# Altium PCB Robotic.PcbDoc
Units mil, origin at the board's own origin, x right, y up, seen from the top; angles counter-clockwise.
Board outline 2165.35 x 1377.95 mil, 2 copper layers (Top Layer, Bottom Layer), stack 61.8 mil thick; 28 components, 16 nets, 79 pads, 273 vias.
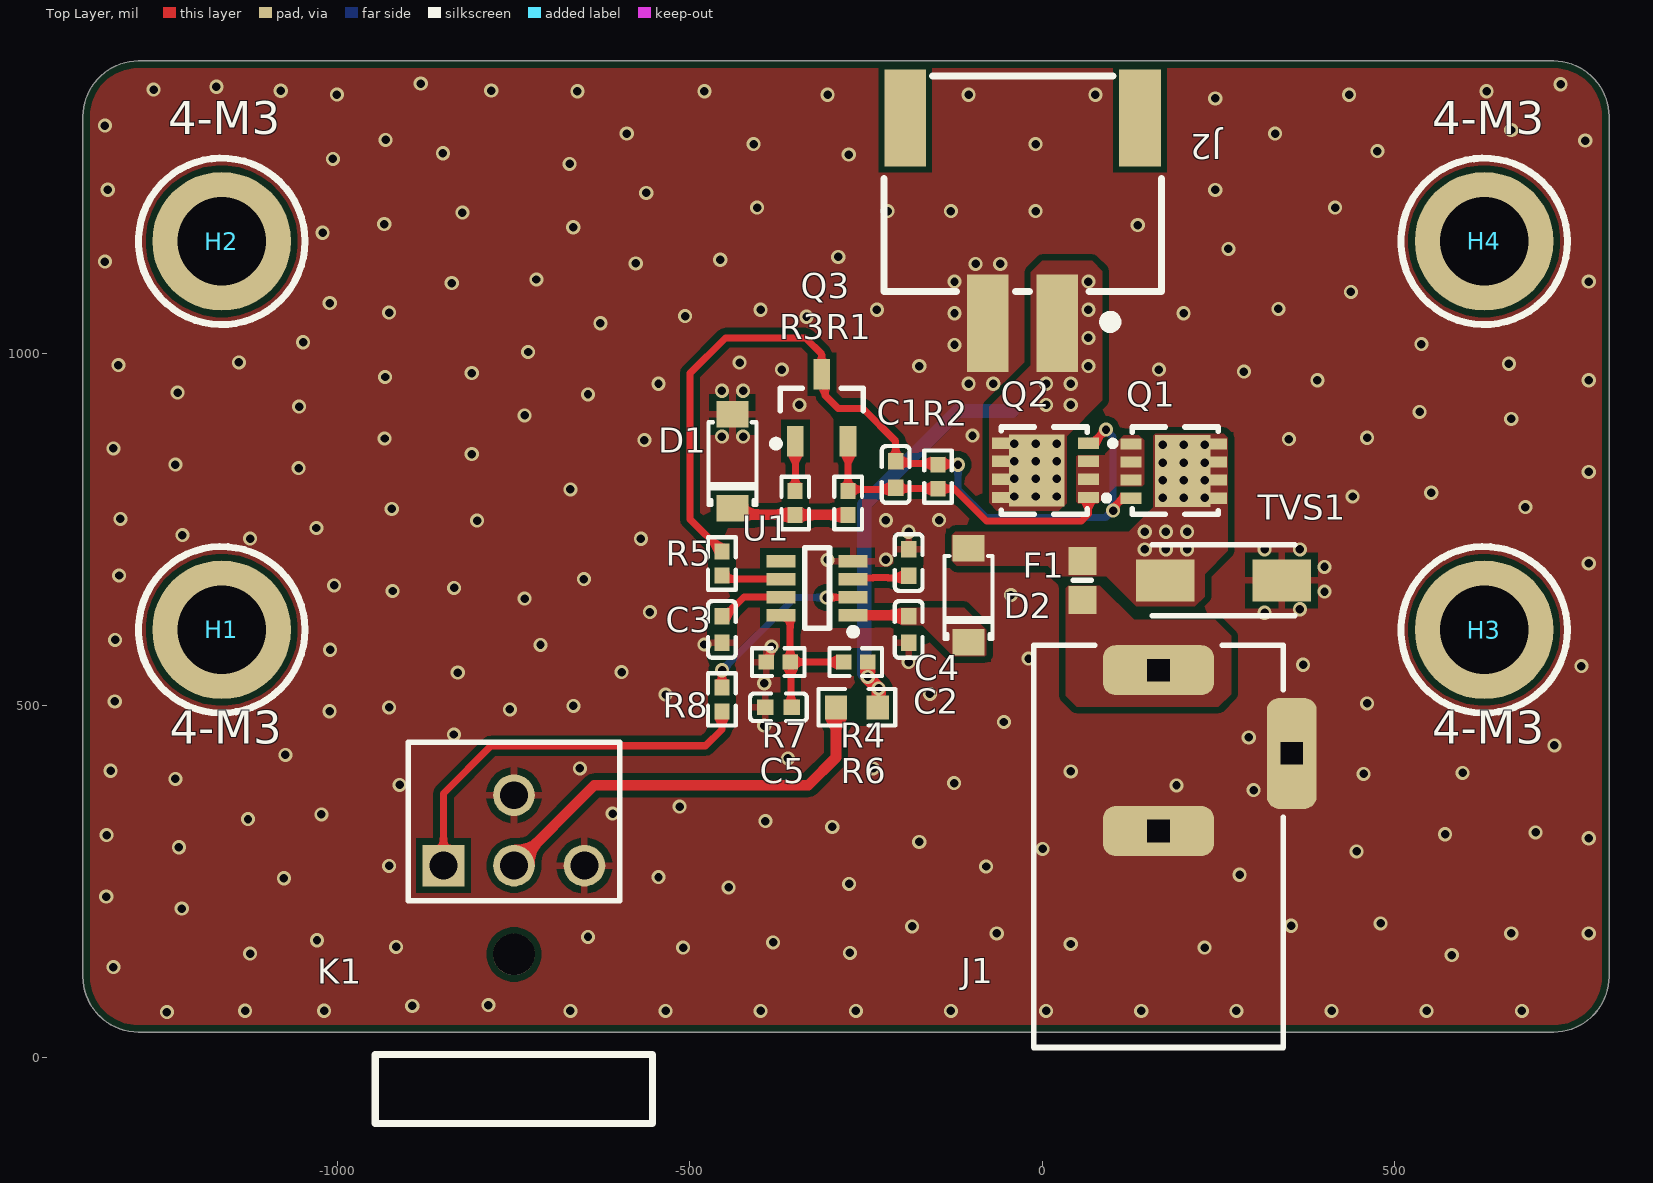
[diagram p0: Top Layer view]
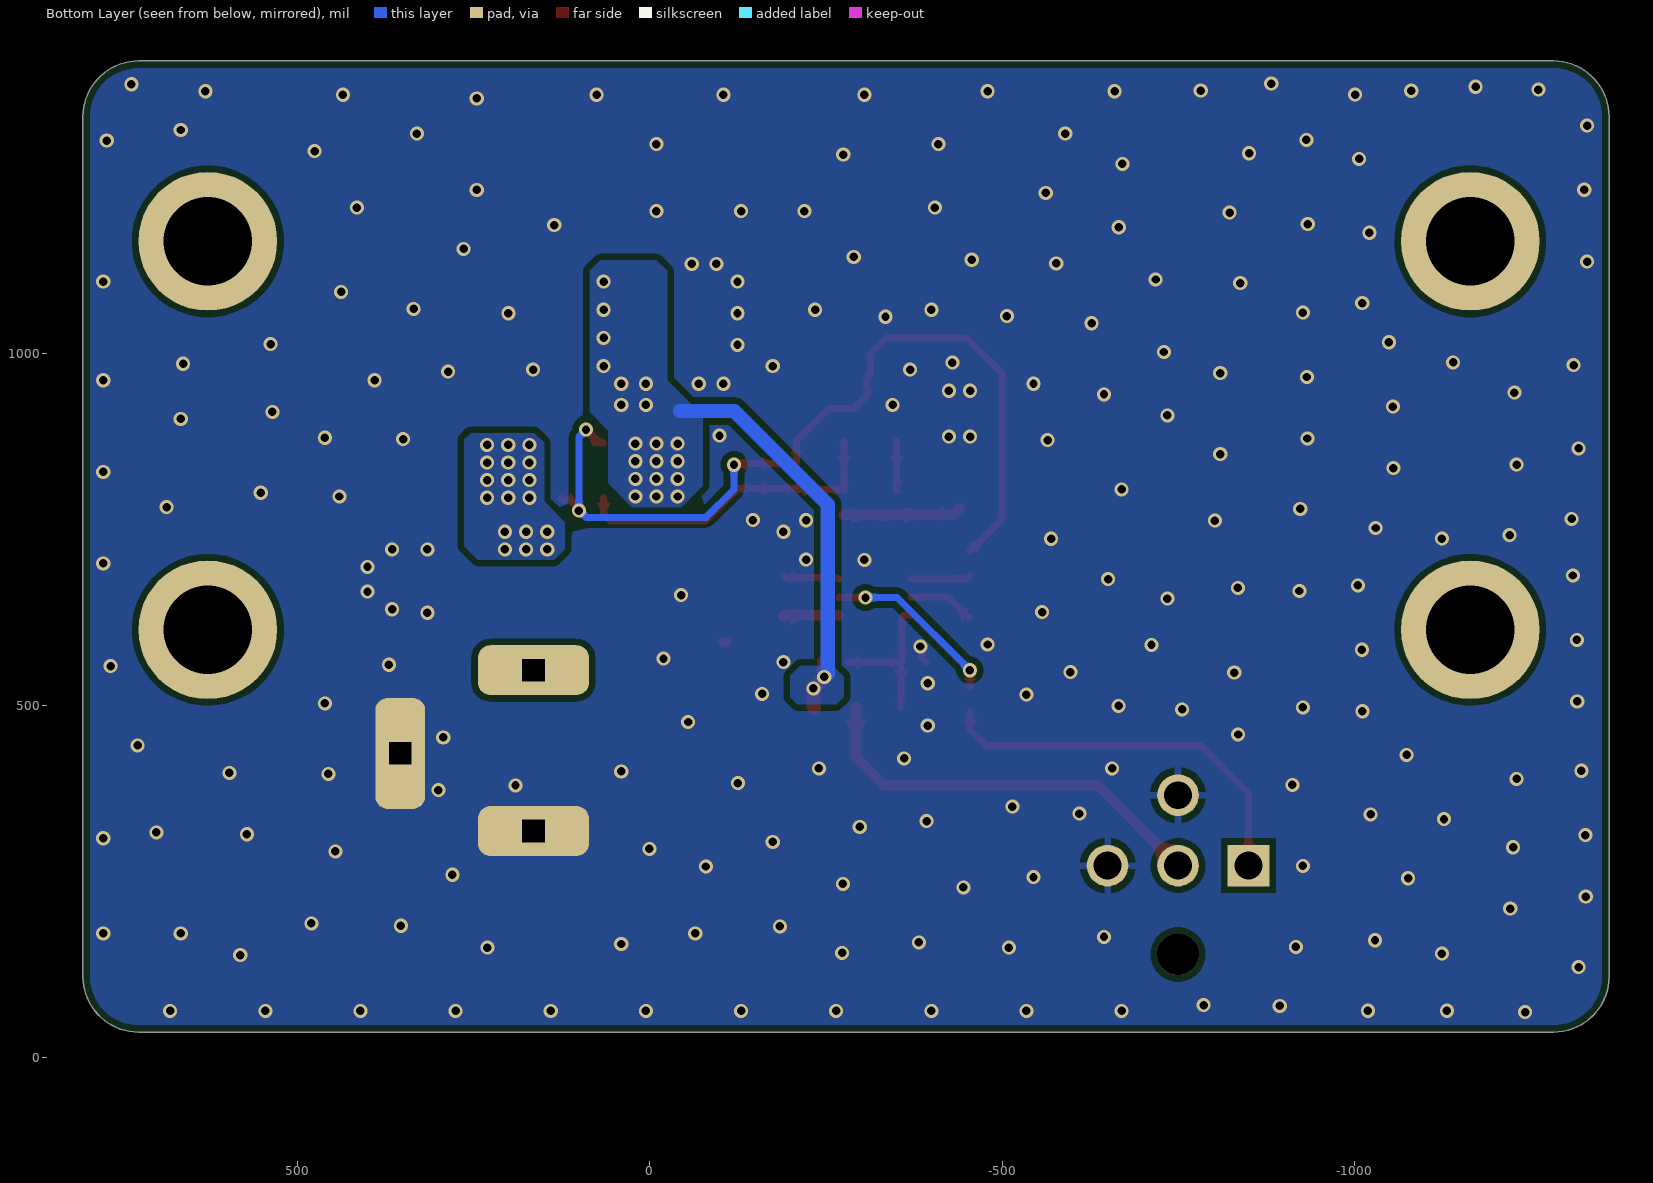
[diagram p1: Bottom Layer view, seen from below]
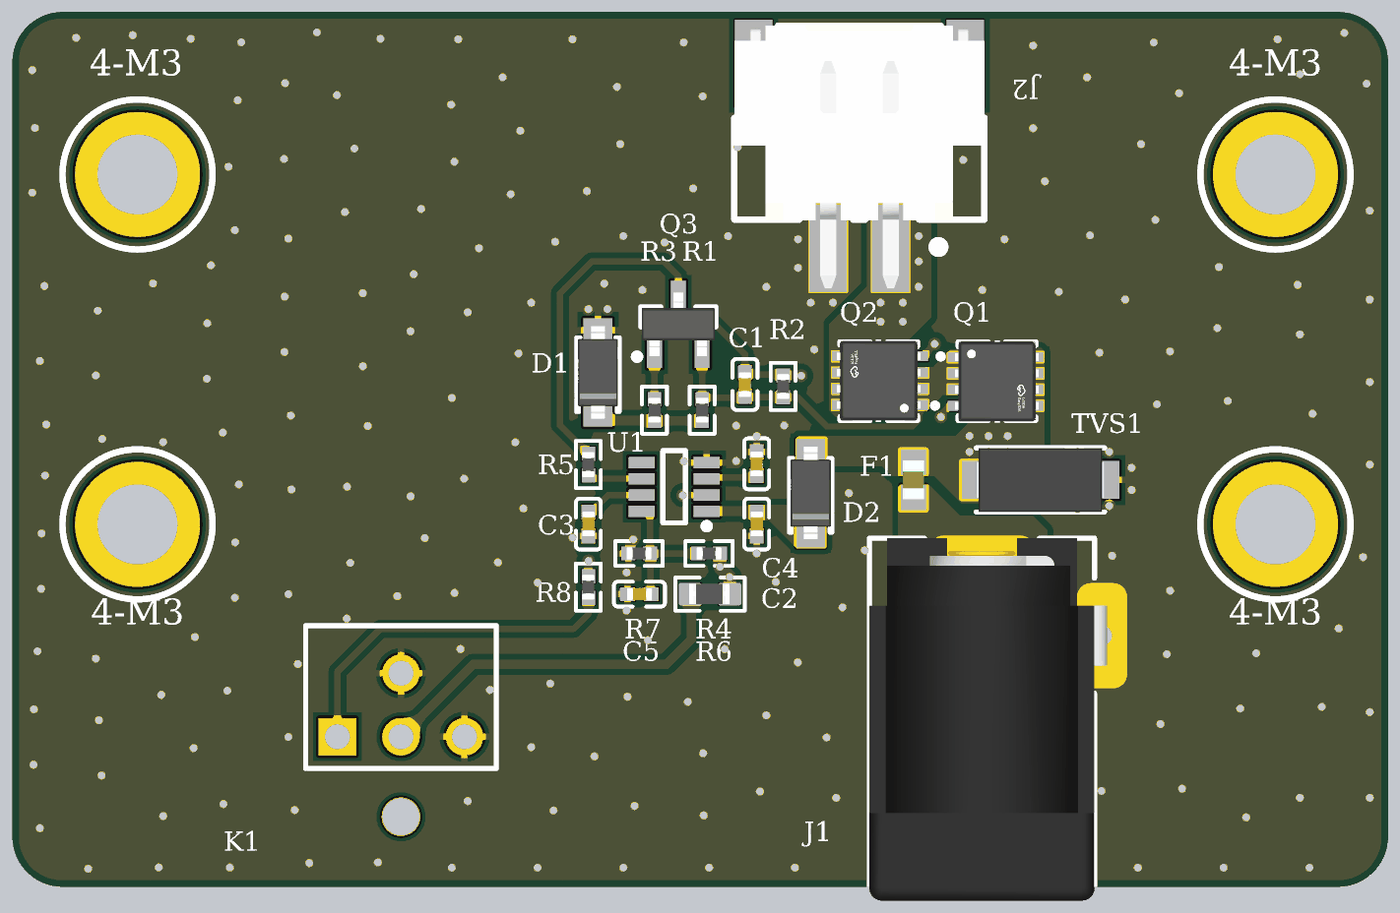
[diagram p2: 3D render of the assembled board from above, using the file's embedded part models]

## Layer stack, top to bottom
Top Solder: solder mask 0.4, Solder Resist, Dk 3.5
Top Layer: signal copper 1.4
Dielectric 1: core 59, Core-043, Dk 4.3
Bottom Layer: signal copper 1.4
Bottom Solder: solder mask 0.4, Solder Resist, Dk 3.5

## Board outline
-1361.17,115.44 -1361.17,1335.91 cw(c-1282.43,1335.91) -1282.43,1414.65 725.44,1414.65 cw(c725.44,1335.91) 804.18,1335.91 804.18,115.44 cw(c725.44,115.44) 725.44,36.7 -1282.43,36.7 cw(c-1282.43,115.44)

## Design rules (kind name [scope] priority, off if disabled: settings)
AcuteAngle [All] p1: minimum=6.00000000000000E+0001 checktracksonly=FALSE
BoardOutlineClearance BoardOutlineClearance_1 [OnLayer('Bottom Layer')] p1: gap=10 ignorepadtopadclearanceinfootprint=FALSE
BoardOutlineClearance [OnLayer('Top Layer')] p2: gap=10 ignorepadtopadclearanceinfootprint=FALSE
Clearance [All] p1: gap=9 ignorepadtopadclearanceinfootprint=TRUE
HoleSize [All] p1: absolutevalues=TRUE maxlimit=999 minlimit=1 maxpercent=80.000 minpercent=20.000
HoleToHoleClearance [All] p1: gap=6 allowstackedmicrovias=TRUE
MinimumAnnularRing [All] p1: minimumring=4
MinimumSolderMaskSliver [All] p1: minsoldermaskwidth=4
PasteMaskExpansion [All] p1: expansion=0 thpadusetoppaste=TRUE thpadusebottompaste=TRUE
PlaneConnect [All] p1: pad.planeconnectstyle=Relief pad.reliefexpansion=20 pad.reliefentries=4 pad.reliefconductorwidth=10 pad.reliefairgap=10 via.planeconnectstyle=Direct via.reliefexpansion=20 via.reliefentries=4 via.reliefconductorwidth=10 via.reliefairgap=10
PolygonConnect PolygonConnect_GND [InNet('GND')] p1: thpad.connectstyle=Direct thpad.reliefconductorwidth=10 thpad.reliefentries=4 thpad.polygonreliefangle="90 Angle" thpad.airgapwidth=10 smdpad.connectstyle=Relief smdpad.reliefconductorwidth=10 smdpad.reliefentries=4 smdpad.polygonreliefangle="90 Angle" smdpad.airgapwidth=10 via.connectstyle=Direct via.reliefconductorwidth=10 via.reliefentries=4 via.polygonreliefangle="90 Angle" via.airgapwidth=10
PolygonConnect [All] p2: connectstyle=Direct reliefconductorwidth=10 reliefentries=4 polygonreliefangle="90 Angle" airgapwidth=10
RoutingVias [All] p1: holewidth=12 width=20 viastyle="Through Hole" minholewidth=8 minwidth=18 maxholewidth=80 maxwidth=80
ShortCircuit [InNet('VCC12V0_IN') vs InNet('VCC12V_DCIN')] p1: allowed=FALSE
SilkToSilkClearance [All] p1: silktosilkclearance=0
SilkToSolderMaskClearance [All] p1: minsilkscreentomaskgap=0 clearancetoexposedcopper=TRUE
SolderMaskExpansion SolderMaskExpansion_via [IsVia] p1: expansion=4 istentingtop=TRUE
SolderMaskExpansion [All] p2: expansion=4 istentingtop=FALSE
SupplyNets "Schematic Supply Nets_4" [InNet('VCC12V_DCIN')] p1: voltage=0.000
SupplyNets "Schematic Supply Nets_1" [InNet('VCC12V0_IN')] p2: voltage=0.000
SupplyNets "Schematic Supply Nets_3" [InNet('GND')] p3: voltage=0.000
UnRoutedNet [All] p1: checkbadconnections=TRUE
Width [All] p1: maxlimit=78.74 minlimit=8 preferedwidth=10
21 further rules are at their usual default settings.

## Classes and differential pairs
component class Top: H1 H2 H3 H4
component class Port: J2
component class Power: * C1 C2 C3 C4 C5 D1 D2 F1 J1 K1 Q1 Q2 Q3 R1 R2 R3 R4 R5 R6 R7 R8 TVS1 U1

## Components (designator, comment, footprint, x,y, rotation, side; value= is the part's Value field where it differs from the comment)
C1 "100nF ±10% 50V X7R" C0402 -207.98,846.62 r270 top
C2 "100nF ±10% 50V X7R" C0402 -189.56,589.3 r90 top
C3 "1uF ±10% 25V X5R" C0402 -454.56,589.3 r90 top
C4 "15nF ±5% 16V X7R" C0402 -189.56,721.7 r270 top
C5 "100nF ±10% 50V X7R" C0402 -392.98,497.57 r0 top
D1 "SS14" SOD-123_L2.8-W1.8-LS3.7-RD -439.56,846.7 r90 top
D2 "SS14" SOD-123_L2.8-W1.8-LS3.7-RD -104.56,656.7 r90 top
F1 "0438005.WRGT" FUSC1508X58N 57.02,677.57 r90 top
H1 "M3" M3_PTH-VIA -1164.32,607.57 r0 top
H2 "M3" M3_PTH-VIA -1164.32,1158.75 r0 top
H3 "M3" M3_PTH-VIA 627.02,607.57 r0 top
H4 "M3" M3_PTH-VIA 627.02,1158.75 r0 top
J1 "694106301002" 694106301002 165,300.29 r0 top
J2 "ZX-XH2.54-2PWT" CONN-SMD_2P-P2.54_MEGASTAR_ZX-XH2.54-2PWT -27.9,1188.12 r180 top
K1 "带灯按键 90度" "带灯按键 90度" -749.61,272.92 r0 top
Q1 "NTTFS5116PLTWG" PDFN3333-8_L3.1-W3.2-P0.65-LS3.4-BL 186.11,832.65 r270 top
Q2 "NTTFS5116PLTWG" PDFN3333-8_L3.1-W3.2-P0.65-LS3.4-BL 5.07,833.9 r90 top
Q3 "PNP-SOT23" SOT23-3 -312.98,922.57 r90 top
R1 "Ω ±1% 62.5mW" R0402 -275.54,787.54 r270 top
R2 "10kΩ ±1% 62.5mW" R0402 -147.98,824.84 r270 top
R3 "Ω ±1% 62.5mW" R0402 -350.56,787.54 r270 top
R4 "182kΩ ±1% 62.5mW" R0402 -264.56,561.7 r0 top
R5 "10kΩ ±1% 62.5mW" R0402 -454.56,701.7 r90 top
R6 "1kΩ ±1% 100mW" R0603 -262.98,497.57 r0 top
R7 "10kΩ ±1% 62.5mW" R0402 -374.72,561.7 r0 top
R8 "0Ω ±1% 62.5mW" R0402 -454.56,508.73 r90 top
TVS1 "SMAJ13A" DIONM5126X250N 257.02,677.57 r0 top
U1 "LTC2954ITS8-2#PBF(LTCNK)" SOT23-8 -319.56,666.7 r180 top

## Footprints (in the part's own frame and the unit in brackets; to place one, negate y for a bottom-side part, rotate by r counter-clockwise, add the part's x,y. Pads: shape width x height; smd on the part's side, far side on the other; paste and mask are expansions set on the pad)
694106301002 [mm] "DC Power Jack Right Angled(6.4)"
  rrect50% 4x1.8 hole 0.8 square: 1(0,6.35) 2(0,0.55)
  rrect50% 1.8x4 hole 0.8 square: 3(4.8,3.35)
  silkscreen extent -4.5,-7.25 4.5,7.25, body extent -4.5,-7.25 5,7.25, height 10.75
C0402 [mm]
  rect 0.6x0.55 smd paste-100 mask+0.051: 1(0,0) 2(0.95,0)
  silkscreen extent -0.55,-0.5 1.5,0.5, body extent -0.02,-0.25 0.98,0.25, height 0.5
CONN-SMD_2P-P2.54_MEGASTAR_ZX-XH2.54-2PWT [mm]
  rect 1.5x3.5 smd paste+0 mask+0.05: 1(-1.25,3.7) 2(1.25,3.7) 3(-4.23,-3.7) 4(4.23,-3.7)
  silkscreen extent -5,-5.21 5,3.85, body extent -5,-5.21 5,5.29, height 6.2
DIONM5126X250N [mm]
  rect 2.1x1.5 smd: 1(-2.1,0) 2(2.1,0)
  silkscreen extent -2.57,-1.28 2.57,1.28, body extent -2.57,-1.28 2.57,1.28, height 2.5
FUSC1508X58N [mm]
  rect 1x1.02 smd: 1(-0.705,0) 2(0.705,0)
  silkscreen extent 0,-0.32 0,0.32, body extent -0.77,-0.43 0.77,0.43, height 0.58
M3_PTH-VIA [mm] "Hole with copper"
  round 5 hole 3.2 mask+0.102: 0(0,0)
  silkscreen extent -3,-3 3,3
PDFN3333-8_L3.1-W3.2-P0.65-LS3.4-BL [mm]
  rect 0.4x0.8 smd paste-100 mask+0.051: D(-0.975,1.533) D(-0.325,1.533) D(0.325,1.533) D(0.975,1.533)
  rect 2.6x2 smd paste-100 mask+0.051: D(-0.005,0.333)
  rect 0.4x0.75 smd paste-100 mask+0.051: G(0.975,-1.533) S(-0.975,-1.533) S(-0.325,-1.533) S(0.325,-1.533)
  silkscreen extent -1.59,-2.29 1.56,1.61, body extent -1.65,-1.61 1.65,1.74, height 0.82
R0402 [mm]
  rect 0.566x0.54 smd mask+0.051: 1(-0.433,0) 2(0.433,0)
  silkscreen extent -0.94,-0.5 0.94,0.5, body extent -0.5,-0.25 0.5,0.25, height 0.5
R0603 [mil]
  rect 31.75x34.02 smd mask+2: 1(-29.66,0) 2(29.66,0)
  silkscreen extent -55,-26 55,26, body extent -33,-16 31,16, height 18
SOD-123_L2.8-W1.8-LS3.7-RD [mm]
  rect 0.95x1.15 smd: 1(-1.692,0) 2(1.692,0)
  silkscreen extent -1.58,-0.87 1.41,0.87, body extent -1.85,-0.8 1.85,0.8, height 1.27
SOT23-3 [mm] "SOT23, 3-Leads, Body 2.92x2.78mm, Pitch 0.95mm, IPC Medium Density"
  rect 1.1x0.6 smd: 1(-1.2,0.95) 2(-1.2,-0.95) 3(1.2,0)
  silkscreen extent -1.42,-1.5 0.7,1.78, body extent -1.27,-1.46 1.27,1.46, height 0.95
SOT23-8 [mm]
  rect 1.05x0.45 smd: 1(-1.3,0.975) 2(-1.3,0.325) 3(-1.3,-0.325) 4(-1.3,-0.975) 5(1.3,-0.975) 6(1.3,-0.325) 7(1.3,0.325) 8(1.3,0.975)
  silkscreen extent -1.42,-1.45 0.45,1.7, body extent -0.81,-1.45 0.81,1.45, height 1.25
"带灯按键 90度" [mm]
  rect 1.5x1.5 hole 1: 1(-2.54,0)
  round 1.5 hole 1: 2(2.54,0) 3(0,2.54) 4(0,0)
  round 1.5 hole 1.5: ""(0,-3.2)
  silkscreen extent -5,-9.3 5,4.44, body extent -4.1,-9.3 4.1,4.44, height 8.2

## Part data
C1 C2: library part C0402, "CL05B104KB54PNC", LatestRevisionDate=17-Jul-2002, LatestRevisionNote="Re-released for DXP Platform.", PackageDescription="Radial Cap, Thru-Hole; 2 Leads; 0.3 in Pin Spacing", PackageReference=RAD-0.3, Published=8-Jun-2000, Publisher="Altium Limited"
C3: library part C0402, "CL05A105KA5NQNC", LatestRevisionDate=17-Jul-2002, LatestRevisionNote="Re-released for DXP Platform.", PackageDescription="Radial Cap, Thru-Hole; 2 Leads; 0.3 in Pin Spacing", PackageReference=RAD-0.3, Published=8-Jun-2000, Publisher="Altium Limited"
C4: library part C0402, "CC0402JRX7R7BB153", LatestRevisionDate=17-Jul-2002, LatestRevisionNote="Re-released for DXP Platform.", PackageDescription="Radial Cap, Thru-Hole; 2 Leads; 0.3 in Pin Spacing", PackageReference=RAD-0.3, Published=8-Jun-2000, Publisher="Altium Limited"
C5: library part C0402, "NC", LatestRevisionDate=17-Jul-2002, LatestRevisionNote="Re-released for DXP Platform.", PackageDescription="Radial Cap, Thru-Hole; 2 Leads; 0.3 in Pin Spacing", PackageReference=RAD-0.3, Published=8-Jun-2000, Publisher="Altium Limited"
D1: library part Diode_Schottky, "NC", Average Rectified Current (Io)=3A, Forward Voltage (Vf@If)=500mV@3A, JLCPCB Part Class=扩展库, LCSC Part Name="40V 3A 500mV@3A", Manufacturer=DIODES(美台), Manufacturer Part=B340A-13-F, Reverse Voltage (Vr)=40V, Add into BOM=yes, Convert to PCB=yes, Datasheet=https://atta.szlcsc.com/upload/public/pdf/source/20171023/C134454_15087453575121052549.pdf, Device=B340A-13-F, Name=B340A-13-F, Supplier=LCSC, Supplier Footprint=SMA(DO-214AC), Supplier Part=C85098, Symbol=B340A-13-F
D2: library part Diode_Schottky, "直流反向耐压(Vr):40V;平均整流电流(Io):3A;正向压降(Vf):500mV@3A;", Average Rectified Current (Io)=3A, Forward Voltage (Vf@If)=500mV@3A, JLCPCB Part Class=扩展库, LCSC Part Name="40V 3A 500mV@3A", Manufacturer=DIODES(美台), Manufacturer Part=B340A-13-F, Reverse Voltage (Vr)=40V, Add into BOM=yes, Convert to PCB=yes, Datasheet=https://atta.szlcsc.com/upload/public/pdf/source/20171023/C134454_15087453575121052549.pdf, Device=B340A-13-F, Name=B340A-13-F, Supplier=LCSC, Supplier Footprint=SMA(DO-214AC), Supplier Part=C85098, Symbol=B340A-13-F
F1: "Fuse", Manufacturer_Name=LITTELFUSE, Mouser Part Number=576-0438005.WRGT, Datasheet Link=https://componentsearchengine.com/Datasheets/1/0438005.WRGT.pdf, Height=0.582mm, Manufacturer_Part_Number=0438005.WRGT, Mouser Price/Stock=https://www.mouser.com/Search/Refine.aspx?Keyword=576-0438005.WRGT
H1 H2 H3 H4: library part PTH_via, "Hole with copper"
J1: "WR-DC DC Power Jack Connector, Male, Right Angled, 24V, 5A / 694106301002", Manufacturer="Wurth Elektronik", Operating Temperature Max=85°C, Operating Temperature Min=-40°C, Rated Current=5A, Working Voltage=24V, Category="DC Power Jack Connector", ComponentLink1Description="Website Link", ComponentLink1URL=https://www.we-online.com/redexpert/article/694106301002?ad, ComponentLink2Description="Datasheet Link", ComponentLink2URL=https://www.we-online.com/redexpert/spec/694106301002?ad, Gender=Male, Manufacturer Part Number=694106301002, Match Code=WR-DC, Mount="Through Hole", Opening Diameter=6.4mm, Orientation="Right Angled", Packaging=Bag, Plug Inner Diameter=2.05mm, Plug Outer Diameter=5.5mm
J2: library part "XH 2.54-2P"
K1: library part POWER_BUTTON, "TS-H016", ComponentLink1Description="taobao link", ComponentLink1URL=https://item.taobao.com/item.htm?app=weixin&bc_fl_src=share-1041097531982389-2-1&bxsign=scduCA0xal-XO8IOwCg5wpTZ62_4hWwrR0o31cAdmFM1qwUmTOvBCID45R3aVFF8pt6SUX1bUUi6K5MIUE04984LWsOBYZqPz2LXT-xbCklezIcbpRGb4Vs3nExVJYaKKq1&cpp=1&id=599692982889&share_crt_v=1&shareurl=true&short_name=h.T6a6hoVG2KmpkJn&sp_tk=dGhrRDNBSzdnb0I%3D&spm=a2159r.13376460.0.0&tbSocialPopKey=shareItem&tk=thkD3AK7goB&un=3f7bc5679e1c2122bbeeeafdb2768e28&un_site=0&ut_sk=1.YK5Oo3FhLCsDAFsJTsxT4p%2B9_21646297_1735282890710.TaoPassword-WeiXin.1&wxsign=tbwrY1V3kXLW1TVuXAlXQ7LMXaRBWfNsmYrNdzs_BFf0gVdZDK8ioCyrkJLZUEYuHe7DcYAE18qP4vC7nR0yzLoQIoOnRTZ2JqIke5QBALRu3QiIMuws65MGu8OR8kGGz63&skuId=4186836653152, Parameter 1="TS-H016电源开关侧面插件带灯按键 带LED带帽轻触开关4脚点动复位"
Q1 Q2: library part MOSFET-P, Continuous Drain Current (Id)=46A, Drain Source On Resistance (RDS(on)@Vgs,Id)=10mΩ@15A,10V, Drain Source Voltage (Vdss)=40V, Gate Threshold Voltage (Vgs(th)@Id)=2.3V@250uA, Input Capacitance (Ciss@Vds)=4.15nF@20V, JLCPCB Part Class="Extended Part", LCSC Part Name="P沟道 耐压:40V 电流:46A", Manufacturer=VISHAY(威世), Manufacturer Part=SI7463ADP-T1-GE3, Operating Temperature=-55℃~+150℃@(Tj), Power Dissipation (Pd)=5W；39W, Reverse Transfer Capacitance (Crss@Vds)=-, Add into BOM=yes, Convert to PCB=yes, Datasheet=https://atta.szlcsc.com/upload/public/pdf/source/20201103/C469466_DEB614A703506C939C03FF0A9B0AE822.pdf, Device=SI7463ADP-T1-GE3, Supplier=LCSC, Supplier Footprint=PowerPAK-SO-8, Supplier Part=C469466, Symbol=SI7463ADP-T1-GE3, Total Gate Charge (Qg@Vgs)=144nC@10V, Type=P沟道
Q3: "NC"
R1 R3: library part R0402, "NC", LatestRevisionDate=17-Jul-2002, LatestRevisionNote="Re-released for DXP Platform.", PackageDescription="Axial Device, Thru-Hole; 2 Leads; 0.3 in Pin Spacing", PackageReference=AXIAL-0.3, Published=8-Jun-2000, Publisher="Altium Limited"
R2 R5 R7: library part R0402, "0402WGF1002TCE", LatestRevisionDate=17-Jul-2002, LatestRevisionNote="Re-released for DXP Platform.", PackageDescription="Axial Device, Thru-Hole; 2 Leads; 0.3 in Pin Spacing", PackageReference=AXIAL-0.3, Published=8-Jun-2000, Publisher="Altium Limited"
R4: library part R0402, "RC0402FR-07182KL", LatestRevisionDate=17-Jul-2002, LatestRevisionNote="Re-released for DXP Platform.", PackageDescription="Axial Device, Thru-Hole; 2 Leads; 0.3 in Pin Spacing", PackageReference=AXIAL-0.3, Published=8-Jun-2000, Publisher="Altium Limited"
R6: library part R0603, "0603WAF1001T5E", LatestRevisionDate=17-Jul-2002, LatestRevisionNote="Re-released for DXP Platform.", PackageDescription="Axial Device, Thru-Hole; 2 Leads; 0.3 in Pin Spacing", PackageReference=AXIAL-0.3, Published=8-Jun-2000, Publisher="Altium Limited"
R8: library part R0402, "0402WGF0000TCE", LatestRevisionDate=17-Jul-2002, LatestRevisionNote="Re-released for DXP Platform.", PackageDescription="Axial Device, Thru-Hole; 2 Leads; 0.3 in Pin Spacing", PackageReference=AXIAL-0.3, Published=8-Jun-2000, Publisher="Altium Limited"
TVS1: "TVS Diode (Uni-directional)", Manufacturer_Name=LITTELFUSE, Mouser Part Number=576-SMAJ13A, Arrow Part Number=SMAJ13A, Arrow Price/Stock=https://www.arrow.com/en/products/smaj13a/littelfuse, Datasheet Link=https://componentsearchengine.com/Datasheets/2/SMAJ13A.pdf, Height=2.5mm, Manufacturer_Part_Number=SMAJ13A, Mouser Price/Stock=https://www.mouser.co.uk/ProductDetail/Littelfuse/SMAJ13A?qs=HR2RnyOI4E60xAs7pDj%2F%252BA%3D%3D
U1: library part LTC2954ITS8-2#PBF, "Linear,LTC2954ITS8-2#PBF,TSOT-23,–40~+85°C,", 制造商=Linear, 名称=电源管理芯片LTC2954ITS8-2#PBF

## Via types
v1: diameter 20, hole 12, Top Layer to Bottom Layer, tented both sides, 273 vias

## Nets (pads, with @x,y where several pads share a name; then routed paths per layer and width w, separated by ;. In a path a pad name is that pad's centre, name@x,y a point inside that pad or via, vN(x,y) a via of type N, cw(c..) or ccw(c..) an arc to the next point about the centre after c; other vN are vias at no path point)
GND: C2.1 C3.1 C4.1 C5.1 D1.2 J1.2 J1.3 J2.2 K1.2 K1.3 R7.1 TVS1.2 U1.4 | length 25.5
  Top Layer w10: R7.1 -391.5,561.7 -385.87,567.33 -385.87,581.9 v1(-383.96,583.81)
  other v1: -1242,65 -1131,67 -1019,67 -669.56,66.7 -534.56,66.7 -399.56,66.7 -264.56,66.7 -129.56,66.7 5.44,66.7 140.44,66.7 275.44,66.7 410.44,66.7 545.44,66.7 680.44,66.7 -894,74 -786,75 -1318,129 581,146 -1124,148 -273,149 -509.56,156.7 230.44,156.7 -916.88,157.57 40.44,161.7 -382,164 -1029.1,166.96 -644.56,171.7 -64.56,176.7 665.44,176.7 775.44,176.7 -184.56,186.7 353.12,187.57 480,191 -1221,212 -1328.1,228.96 -445,242 -274,247 -1076,255 -544.56,256.7 280,260 -79.56,271.7 -926.88,272.57 446,293 0.44,296.7 -1225,299 -174.56,306.7 775.44,311.7 -1327.55,316.25 571.57,317.46 700,320 -298,328 -393,336 -1127,339 -1022.88,345.57 -609.56,346.7 -514.56,356.7 300,380 190.44,386.7 -911.88,387.57 -125,390 -1230,396 456,403 596.57,404.46 40.44,406.7 -1321.88,407.57 -656,411 -240,411 -361,425 -1074,430 726.57,443.46 293,455 -835,459 -394.56,471.7 -54.56,476.7 -1011.1,491.96 -755.3,494.56 -926.88,497.57 -665.3,499.56 461,503 -1316.1,505.96 -534.56,515.69 -159.56,516.7 -394.56,531.7 -829.43,546.88 -596.88,547.57 765,556 370,558 -189.56,561.7 -19.56,566.7 -1010.55,579.25 -712,586 -479.56,586.7 -1315.55,593.25 315.44,631.7 -556.88,632.57 365.44,636.7 -734.43,651.88 -44.56,656.7 400.44,661.7 -921.88,662.57 -834.43,666.88 -1004.88,670.57 -650.3,679.56 -1309.88,684.57 400.44,696.7 775.44,701.7 -304.56,706.7 -221.95,707.23 315.44,721.7 365.44,721.7 -1124,737 -569.56,736.7 -1220,742 -189.56,746.7 -1030,752 -801.88,762.57 -222,763 -146.35,763.29 -1308,765 -923,779 685.44,781.7 440.44,796.7 552,802 -669.56,806.7 775.44,831.7 -1055.1,836.96 -1230.1,841.96 -809.56,856.7 -1318.1,864.96 -564.56,876.7 350,878 -933.1,878.96 461,880 -454.56,881.7 -424.56,881.7 -99,883 665.44,906.7 -734.56,911.7 535.44,916.7 -1054.55,924.25 -344.56,926.7 -644.56,941.7 -1227,944 -454.56,946.7 -424.56,946.7 -544.56,956.7 -104.56,956.7 -69.56,956.7 390.44,961.7 775.44,961.7 -932.55,966.25 -809.56,971.7 286,974 -369.56,976.7 165.44,976.7 -174.56,981.7 -1311,983 662,985 -1140,987 -429.56,986.7 -729.56,1001.7 -124.56,1011.7 538,1013 -1048.88,1015.57 -626.88,1042.57 -334.56,1051.7 -506.88,1052.57 -124.56,1056.7 200.44,1056.7 -926.88,1057.57 -399.56,1061.7 -234.56,1061.7 335,1063 -1011,1071 438,1087 -837.88,1099.57 -124.56,1101.7 775.44,1101.7 -717.88,1104.57 -94.56,1126.7 -59.56,1126.7 -576.88,1127.57 -1330,1130 -456.88,1132.57 -289.56,1136.7 264,1148 -1021.1,1170.96 -665.56,1178.7 135.44,1181.7 -933.65,1183.11 -822.88,1199.57 -219.56,1201.7 -129.56,1201.7 -9.56,1201.7 -404.56,1206.7 415.44,1206.7 -561.88,1227.57 -1326,1232 245.44,1231.7 -670.56,1268.7 -1006.67,1275.69 -274.56,1281.7 -850.56,1283.7 475.44,1286.7 -409.56,1296.7 -9.56,1296.7 770.44,1301.7 -931.88,1302.57 -589.56,1311.7 330.44,1311.7 665.44,1316.7 -1330,1323 245.44,1361.7 -1001,1367 -304.56,1366.7 -104.56,1366.7 75.44,1366.7 435.44,1366.7 -659.56,1371.7 -479.56,1371.7 630.44,1371.7 -1080.52,1372.44 -781.88,1372.57 -1261,1374 -1171.84,1378.1 735.44,1381.7 -881.88,1382.57
KEY: R8.2 U1.2 | length 253.4
  Top Layer w10: R8.2 -454.56,549.81 v1(-454.28,550.09) ; v1(-306.18,653.25) -305.85,653.58 -268.7,653.58 U1.2
  Bottom Layer w10: v1(-454.28,550.09) -350.99,653.38 -306.3,653.38 v1(-306.18,653.25)
MOS_Ctrl: C1.1 Q1.G Q2.G Q3.3 R2.1 R5.2 | length 1258.5
  Top Layer w10: R5.2 -454.56,719.24 -499.56,764.24 -499.56,971.7 -449.56,1021.7 -335.91,1021.7 -312.98,998.77 Q3.3 -307.99,964.81 -307.99,940.13 -289.56,921.7 -254.56,921.7 -207.98,875.12 C1.1 -204.97,843.61 -121.47,843.61 v1(-119.56,841.7) ; Q2.G 72.33,872.29 75.21,875.16 75.21,876.46 v1(90.44,891.7) ; v1(100.44,776.7) 102.36,778.61 102.36,782.44 111.3,791.39 122.87,791.39 Q1.G
  Bottom Layer w10: v1(-119.56,841.7) -119.56,806.7 -79.56,766.7 89.58,766.7 99.58,776.7 v1(100.44,776.7) 100.44,880.84 90.44,890.84 v1(90.44,891.7)
NetC1_2: C1.2 Q1.S Q2.S Q3.2 R1.1 R2.2 | length 462.8
  Top Layer w10: Q3.2@-274.48,874.22 Q3.2 R1.1 -273.26,806.9 -210.3,806.9 C1.2 -206.57,807.8 R2.2 -125.42,807.8 -79.31,761.7 55.44,761.7 65.44,771.7 Q2.S@65.44,795.51
NetC2_2: C2.2 D2.1 U1.1 | length 83.4
  Top Layer w15: U1.1 -191.17,628.31 C2.2 ; D2.1@-108.49,590.07 D2.1
NetC3_2: C3.2 U1.7 | length 96.7
  Top Layer w10: C3.2 -452.55,624.69 -423.34,653.9 U1.7
NetC4_2: C4.2 U1.3 | length 81.2
  Top Layer w10: U1.3 -266.65,681.23 -240.38,681.23 -239.91,681.7 -219.2,681.7 -218.73,681.23 -192.63,681.23 C4.2
NetC5_2: C5.2 R4.1 R7.2 U1.8 | length 218.5
  Top Layer w10: U1.8 -361.54,628.31 -357.68,624.46 R7.2 ; C5.2 -356.63,498.62 -356.63,560.65 R7.2 ; R4.1 R7.2
NetD1_1: D1.1 R1.2 R3.2 | length 167.8
  Top Layer w15: D1.1 -430.5,771.01 R3.2@-350.56,771.01 ; R3.2 R1.2
NetF1_1: F1.1 J1.1
NetK1_1: K1.1 R8.1 | length 560.7
  Top Layer w10: K1.1 -849.61,375.49 -782.1,443 -477.68,443 -454.56,466.12 R8.1
NetK1_4: K1.4 R6.1 | length 591.7
  Top Layer w15: K1.4 -635.53,387 -332,387 -292.64,426.36 R6.1
NetQ3_1: Q3.1 R3.1 | length 70.8
  Top Layer w10: R3.1 -350.47,804.67 -350.47,875.23 Q3.1
NetR5_1: R5.1 U1.6 | length 86
  Top Layer w10: R5.1 -449.48,679.58 -370.82,679.58 U1.6
VCC12V0_IN: J2.1 Q2.D R4.2 R6.2 | length 582.4
  Top Layer w20: R4.2 -247.61,561.61 v1(-247.61,540.66) -247.61,539.88 v1(-232.19,524.47) -232.19,498.69 R6.2
  Bottom Layer w20: v1(-247.61,540.66) -252.64,545.69 -252.64,785.36 -120,918 -43,918
  other v1: -39.56,796.7 -9.56,796.7 20.44,796.7 -39.56,821.7 -9.56,821.7 20.44,821.7 -39.56,846.7 -9.56,846.7 20.44,846.7 -39.56,871.7 -9.56,871.7 20.44,871.7 5.44,926.7 40.44,926.7 5.44,956.7 40.44,956.7 65.44,981.7 65.44,1021.7 65.44,1061.7 65.44,1101.7
VCC12V_DCIN: D2.2 F1.2 Q1.D TVS1.1
  other v1: 145.44,721.7 175.44,721.7 205.44,721.7 145.44,746.7 175.44,746.7 205.44,746.7 170.74,794.85 200.74,794.85 230.74,794.85 170.74,819.85 200.74,819.85 230.74,819.85 170.74,844.85 200.74,844.85 230.74,844.85 170.74,869.85 200.74,869.85 230.74,869.85
pads on no net: H1.0 H2.0 H3.0 H4.0 J2.3 J2.4 K1. U1.5

## Polygon pours and split planes (outlines as drawn)
GND on Top Layer "GND_L01_P013" (solid, remove dead copper, pour order 13): -1361.17,115.44 -1361.17,1335.91 cw(c-1282.43,1335.91) -1282.43,1414.65 725.44,1414.65 cw(c725.44,1335.91) 804.18,1335.91 804.18,115.44 cw(c725.44,115.44) 725.44,36.7 -1282.43,36.7 cw(c-1282.43,115.44)
VCC12V0_IN on Top Layer "VCC12V0_IN_L01_P005" (solid, remove dead copper, pour order 5): -16,983.26 -16,1115 0,1131 71,1131 85.44,1116.56 85.44,933.44 34.44,882.44 34.44,787.44 23.7,776.7 -64.56,776.7 -75.56,787.7 -75.56,923.7
NetF1_1 on Top Layer "NETF1_1_L01_P000" (solid, remove dead copper, pour order 0): 250,498 268,516 268,599.14 245.44,621.7 130.3,621.7 81.87,670.13 36.59,670.13 33.02,666.57 33.02,514.12 49.14,498
VCC12V_DCIN on Top Layer "VCC12V_DCIN_L01_P004" (solid, remove dead copper, pour order 4): -128.56,705.7 -121.56,698.7 7.47,698.7 22.47,683.7 90.44,683.7 133.44,640.7 216.44,640.7 230.44,654.7 230.44,686.7 263.44,719.7 263.44,879.7 257.44,885.7 160.44,885.7 157.44,882.7 157.44,781.7 122.44,746.7 -123.56,746.7 -128.56,741.7
NetC2_2 on Top Layer "NETC2_2_L01_P003" (solid, remove dead copper, pour order 3): -205.56,619.7 -199.56,613.7 -170.56,613.7 -126.56,569.7 -81.56,569.7 -79.56,571.7 -79.56,607.7 -110.64,638.78 -202.47,638.78 -205.56,635.7
NetC1_2 on Top Layer "NETC1_2_L01_P002" (solid, remove dead copper, pour order 2): 51.07,786.46 48.07,789.46 48.07,853.46 51.07,856.46 88.07,856.46 115.31,883.7 138.44,883.7 144.44,877.7 144.44,813.83 140.07,809.46 102.07,809.46 79.07,786.46
GND on Bottom Layer "GND_L02_P014" (solid, remove dead copper, pour order 14): -1361.17,115.44 -1361.17,1335.91 cw(c-1282.43,1335.91) -1282.43,1414.65 725.44,1414.65 cw(c725.44,1335.91) 804.18,1335.91 804.18,115.44 cw(c725.44,115.44) 725.44,36.7 -1282.43,36.7 cw(c-1282.43,115.44)
VCC12V0_IN on Bottom Layer "VCC12V0_IN_L02_P009" (solid, remove dead copper, pour order 9): -275,541.26 -259.56,556.7 -213.7,556.7 -199.56,542.56 -199.56,511.7 -209.56,501.7 -264.7,501.7 -275,512
VCC12V0_IN on Bottom Layer "VCC12V0_IN_L02_P008" (solid, remove dead copper, pour order 8): -75,812.14 -44.56,781.7 25.44,781.7 59,815.26 59,890.26 85.44,916.7 85.44,1116.7 70.44,1131.7 -9.56,1131.7 -24.56,1116.7 -24.56,961.7 -75,911.26
VCC12V_DCIN on Bottom Layer "VCC12V_DCIN_L02_P007" (solid, remove dead copper, pour order 7): 150,873 163.7,886.7 254.3,886.7 263,878 263,726 243.7,706.7 135.44,706.7 120.44,721.7 120.44,760.44 150,790

## Other copper
Bottom Layer:
  pour cut-out: 89.58,751.41 105.54,751.41 110.25,746.7

## Silkscreen, mask and mechanical layers (free items; w line width, h text height)
Top Overlay:
  text "4-M3" at -1239.97,1294.91 h80
  text "4-M3" at 553.48,1294.91 h80
  text "4-M3" at -1237.97,429.91 h80
  text "4-M3" at 553.48,429.91 h80
Mechanical 1:
  the board outline again, w7.87

## Text inside footprints (layer, text, board x,y; h text height)
Q3: Mechanical 15 "S-E" at -295.98,846.81 h20 r90; Mechanical 15 "G-B" at -343.98,916.81 h20 r90; Mechanical 15 "D-C" at -273.98,936.81 h20 r90